# EAGLE board ThinkerCAD file (EAGLE 9.7.0)

Size 230.23 x 117.19 mm. Coordinates in mm from the lower left corner, seen from the top.
Outline: 0,0 230.23,0 230.23,117.19 0,117.19 0,0
Copper layers (1*16): Top 0.035mm / dielectric 1.5mm / Bottom 0.035mm
Design rules "default": minimum track width 6mil, minimum drill 0.35mm, track to track 6mil, track to pad 6mil, pad to pad 6mil, via to via 6mil, smd to smd 6mil, copper to edge 40mil, drill to drill 6mil, minimum pad ring 10mil, minimum via ring 8mil, stop-mask expansion 4mil, vias tented up to drill 0mil, thermal gap 10mil

## Footprints (pad centres in the part's own frame; a part is rotated, then mirrored left to right if it is on the bottom)
LEDRD254W60D565H860B = drill 0.981 pad 1.581: 1 -1.27,0; 2 1.27,0
LEDRD254W60D565H860B_O = drill 0.981 pad 1.581: 1 -1.27,0; 2 1.27,0
LEDRD254W60D565H860B_G = drill 0.981 pad 1.581: 1 -1.27,0; 2 1.27,0
MOTOR = drill 1.118 pad 3.15 octagon: + 2.54,0; - -2.54,0
PIEZO = drill 1 pad 1.6: 1 -3.5,0; 2 3.5,0
RESAD1016W63L850D250B = drill 0.83 pad 1.43: 1 -5.08,0; 2 5.08,0
SW-200D = drill 0.85 pad 1.45: 1 -7.15,0; 2 7.15,0
ARDUINO-UNO-R3-SHIELD = drill 1.016 pad 1.88: 3.3V 24.13,-2.54; 5V 24.13,0; A0 24.13,12.7; A1 24.13,15.24; A2 24.13,17.78; A3 24.13,20.32; A4 24.13,22.86; A5 24.13,25.4; AREF -24.13,-13.97; D2 -24.13,20.32; D3 -24.13,17.78; D4 -24.13,15.24; D5 -24.13,12.7; D6 -24.13,10.16; D7 -24.13,7.62; D8 -24.13,3.81; D9 -24.13,1.27; D10 -24.13,-1.27; D11 -24.13,-3.81; D12 -24.13,-6.35; D13 -24.13,-8.89; GND@0 24.13,2.54; GND@1 24.13,5.08; GND@2 -24.13,-11.43; IOREF 24.13,-7.62; NC 24.13,-10.16; RES 24.13,-5.08; RX -24.13,25.4; SCL -24.13,-19.05; SDA -24.13,-16.51; TX -24.13,22.86; VIN 24.13,7.62
LCD-I2C = drill 1.016 long: 1 -19.05,-5.08; 2 -19.05,-7.62; 3 -19.05,-10.16; 4 -19.05,-12.7

## Placement (x,y rotation side)
D1  RED  [LEDRD254W60D565H860B]  137.78,106.49 180 top
D2  ORANGE  [LEDRD254W60D565H860B_O]  152.37,106.73 180 top
D3  GREEN  [LEDRD254W60D565H860B_G]  168.45,105.85 180 top
M1  MOTOR_HDR  [MOTOR]  195.44,101.93 0 top
PIEZO1  PIEZO  [PIEZO]  218.5,14.21 0 top
R1  1k  [RESAD1016W63L850D250B]  114.49,104.04 90 top
R2  1k  [RESAD1016W63L850D250B]  147.1,99.84 90 top
R3  1k  [RESAD1016W63L850D250B]  134.4,99.84 90 top
R4  1k  [RESAD1016W63L850D250B]  164.88,99.84 90 top
TILT1  TILT  [SW-200D]  101.54,110.16 0 top
U1  ARDUINO-UNO-R3-SHIELD  [ARDUINO-UNO-R3-SHIELD]  47.88,84.31 270 top
U2  LCD-16X2-I2CSUNFOUNDER-IIC  [LCD-I2C]  119.54,36.63 0 top

## Library data of the parts
D1 = Tinkercad; CATEGORY: Opto-Electronic; SUB-CATEGORY: LED; VALUE: LED_RED
D2 = Tinkercad; CATEGORY: Opto-Electronic; SUB-CATEGORY: LED; VALUE: LED_ORANGE
D3 = Tinkercad; CATEGORY: Opto-Electronic; SUB-CATEGORY: LED; VALUE: LED_GREEN
M1 PIEZO1 R1-R4 TILT1 U1 U2 = Tinkercad

## Nets
D1_C: D1.2 R3.2
D2_C: D2.2 R2.2
D3_C: D3.2 R4.2
TILT1_2: R1.2 TILT1.2
U1_5V: U1.5V U2.2
U1_A4: U1.A4 U2.3
U1_A5: U1.A5 U2.4
U1_D2: TILT1.1 U1.D2
U1_D3: D3.1 U1.D3
U1_D4: D2.1 U1.D4
U1_D5: M1.+ U1.D5
U1_D6: D1.1 U1.D6
U1_D7: PIEZO1.1 U1.D7
U1_GND: M1.- PIEZO1.2 R1.1 R2.1 R3.1 R4.1 U1.GND@0 U1.GND@1 U1.GND@2 U2.1

## Tracks (layer width: path | path; a pad name or v marks a point on that pad's centre or on a via)
D1_C  (1 unrouted)
D2_C  (1 unrouted)
D3_C  (1 unrouted)
TILT1_2  (1 unrouted)
U1_5V  (1 unrouted)
U1_A4  (1 unrouted)
U1_A5  (1 unrouted)
U1_D2  (1 unrouted)
U1_D3  (1 unrouted)
U1_D4  (1 unrouted)
U1_D5  (1 unrouted)
U1_D6  (1 unrouted)
U1_D7  (1 unrouted)
U1_GND  (9 unrouted)